# Altium PCB Chassis_V1.PcbDoc
Units mm, origin at the board's own origin, x right, y up, seen from the top; angles counter-clockwise.
Board outline 52 x 26 mm, 2 copper layers (Top Layer, Bottom Layer); 53 components, 34 nets, 197 pads, 50 vias.
Unrouted connection lines stored in the file: 50.
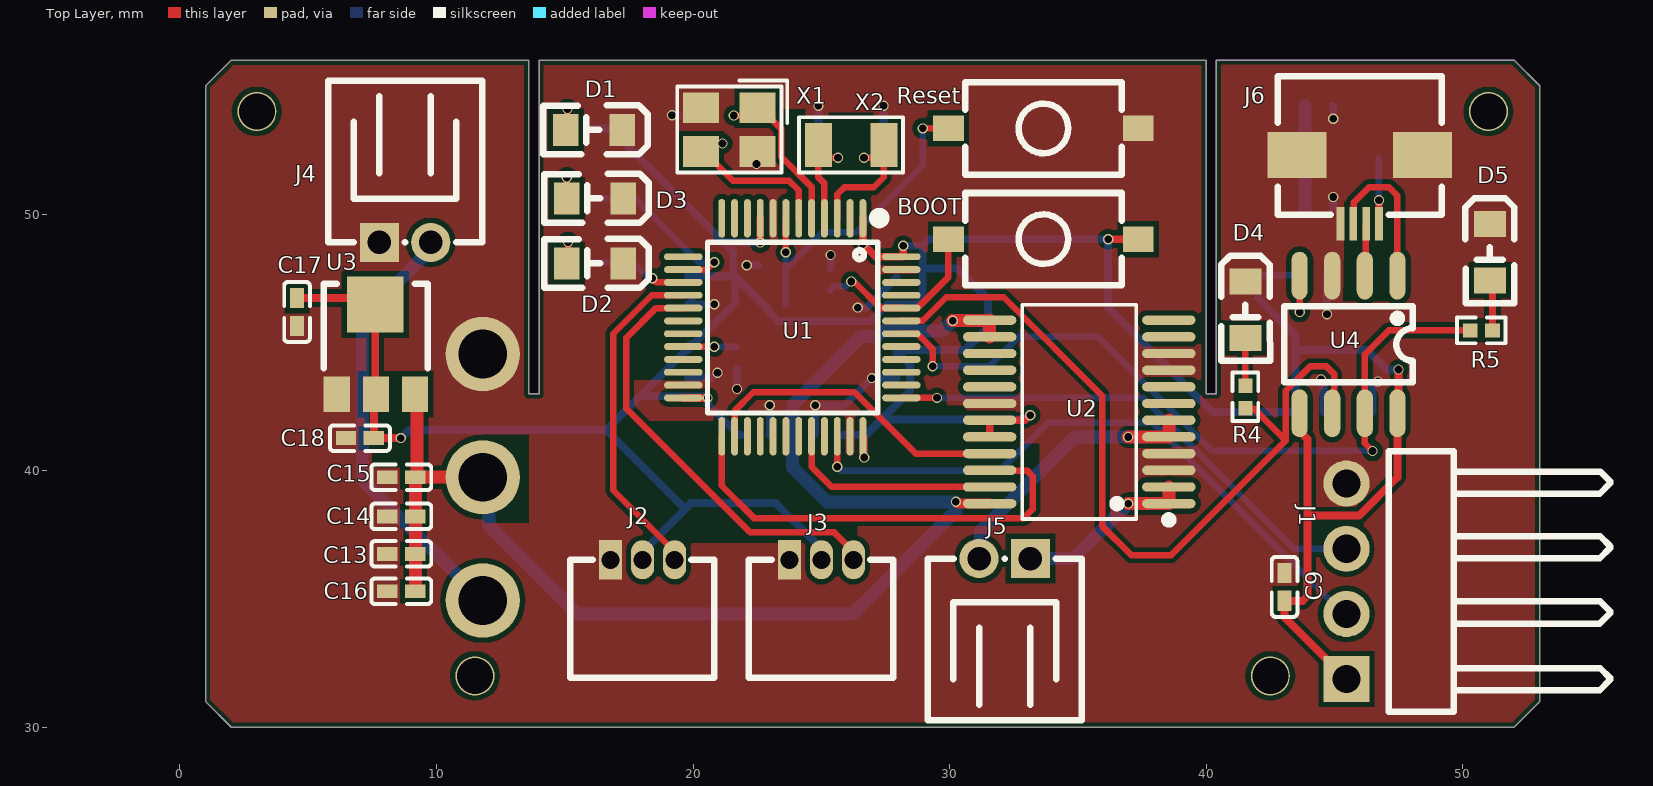
[diagram p0: Top Layer view]
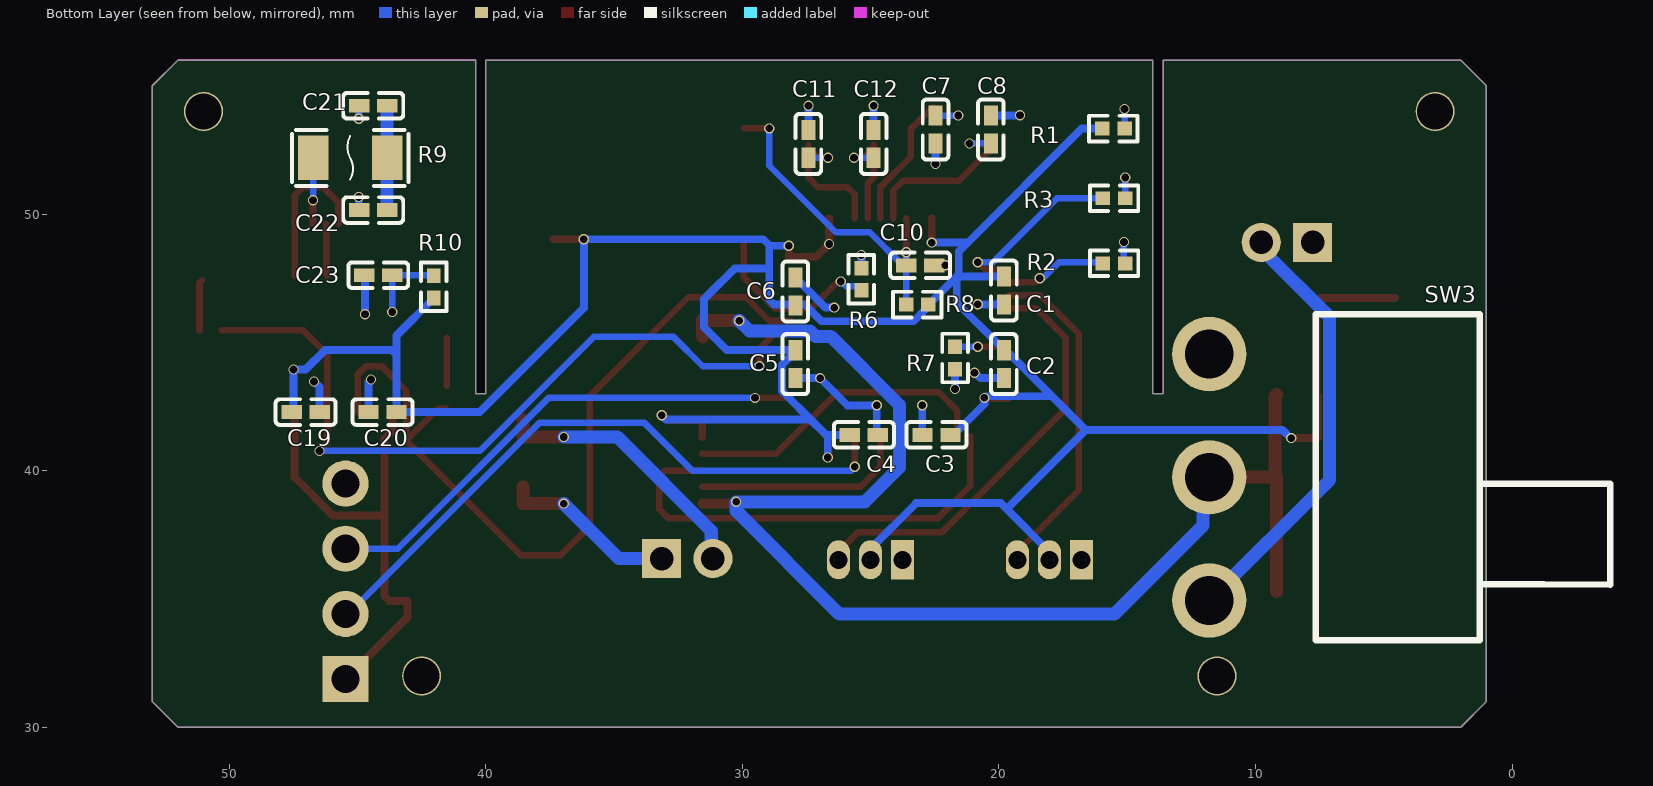
[diagram p1: Bottom Layer view, seen from below]

## Layer stack, top to bottom
Top Solder: solder mask 0.0102, Solder Resist, Dk 3.5
Top Layer: signal copper 0.0356
Dielectric 1: dielectric 0.32, FR-4, Dk 4.8
Bottom Layer: signal copper 0.0356
Bottom Solder: solder mask 0.0102, Solder Resist, Dk 3.5

## Board outline
2,30 1,31 1,55 2,56 13.6,56 13.6,43 14,43 14,56 40,56 40,43 40.4,43 40.4,56 52,56 53,55 53,31 52,30

## Design rules (kind name [scope] priority, off if disabled: settings)
Clearance [All] p1: gap=0.2 ignorepadtopadclearanceinfootprint=FALSE except(0: Arc-Hole Track-Hole SMDPad-Hole THPad-Hole Via-Hole Fill-Hole Poly-Hole Region-Hole Text-Hole; 0.1: Arc-SMDPad Track-SMDPad SMDPad-SMDPad; 0.18: Arc-Arc Arc-Track Arc-THPad Arc-Via Arc-Fill Arc-Poly Arc-Region Arc-Text Track-Track Track-THPad Track-Via Track-Fill Track-Poly Track-Region Track-Text; 0.5: THPad-Via Via-Via)
HoleToHoleClearance [All] p1: gap=0.305 allowstackedmicrovias=TRUE
MinimumSolderMaskSliver [All] p1: minsoldermaskwidth=0.051
PasteMaskExpansion [All] p1: expansion=0.05
PlaneClearance [All] p1: clearance=0.254
PlaneConnect [All] p1: planeconnectstyle=Direct reliefexpansion=0.508 reliefentries=4 reliefconductorwidth=0.254 reliefairgap=0.254
PolygonConnect [All] p1: connectstyle=Direct reliefconductorwidth=0.254 reliefentries=4 polygonreliefangle="90 Angle" airgapwidth=0.254
RoutingVias [All] p1: holewidth=0.3 width=0.4 viastyle="Through Hole" minholewidth=0.3 minwidth=0.4 maxholewidth=0.3 maxwidth=0.4
SilkToSilkClearance [All] p1: silktosilkclearance=0.025
SilkToSolderMaskClearance [IsPad] p1: minsilkscreentomaskgap=0.051 clearancetoexposedcopper=TRUE
SolderMaskExpansion [All] p1: expansion=0.1 istentingtop=FALSE
UnRoutedNet [All] p1: checkbadconnections=TRUE
Width PWR_idth [InNetClass('PWR')] p1: maxlimit=0.508 minlimit=0.305 preferedwidth=0.305 minimp=50.000000 maximp=50.000000 favimp=50.000000
Width [All] p2: maxlimit=0.254 minlimit=0.254 preferedwidth=0.254
22 further rules are at their usual default settings.

## Classes and differential pairs
net class PWR: AO1 AO2 GND NetJ4_2 VBUS "VCC 3V3" VM

## Components (designator, comment, footprint, x,y, rotation, side; value= is the part's Value field where it differs from the comment)
BOOT "Switch" KEY-SMD_2P-L6.0-W3.6-P7.4-LS8.0-L 33.655,49.022 r0 top (schematic designator SW1)
C1 "CAP-0402" C0402 19.806,47.021 r90 bottom
C2 "CAP-0402" C0402 19.806,44.153 r90 bottom
C3 "CAP-0402" C0402 22.436,41.396 r180 bottom
C4 "CAP-0402" C0402 25.267,41.396 r0 bottom
C5 "CAP-0402" C0402 27.934,44.153 r90 bottom
C6 "CAP-0402" C0402 27.934,46.984 r270 bottom
C7 "CAP-0402" C0402 22.473,53.297 r270 bottom
C8 "CAP-0402" C0402 20.314,53.297 r270 bottom
C9 "CAP-0402" C0402 43.053,35.47 r270 top
C10 "CAP-0402" C0402 23.071,48 r0 bottom
C11 "CAP-0402" C0402 27.426,52.736 r270 bottom
C12 "CAP-0402" C0402 24.886,52.736 r270 bottom
C13 "CAP-0402" C0402 8.63,36.759 r0 top
C14 "CAP-0402" C0402 8.63,38.221 r0 top
C15 "CAP-0402" C0402 8.63,39.745 r0 top
C16 "CAP-0402" C0402 8.63,35.3 r0 top
C17 "CAP-0402" C0402 4.566,46.185 r90 top
C18 "CAP-0402" C0402 7.016,41.269 r0 top
C19 "CAP-0402" C0402 47.021,42.285 r0 bottom
C20 "CAP-0402" C0402 44.026,42.285 r180 bottom
C21 "CAP-0402" C0402 44.386,54.223 r180 bottom
C22 "CAP-0402" C0402 44.386,50.159 r180 bottom
C23 "CAP-0402" C0402 44.19,47.619 r180 bottom
D1 "LED0805-RD" LED0805-RD 16.142,53.283 r180 top
D2 "LED0805-RD" LED0805-RD 16.182,48.081 r180 top
D3 "LED0805-RD" LED0805-RD 16.182,50.616 r180 top
D4 "LED0805-RD" LED0805-RD 41.529,46.271 r270 top
D5 "LED0805-RD" LED0805-RD 51.054,48.514 r270 top
J1 "HDR-1X4" HDR-TH_4P-P2.54-H-M-W10.4 45.466,35.687 r90 top
J2 "MX1.25-3pin" CONN-TH_3P-P1.25_BX-MX1.25-3PWZ 18.034,36.527 r0 top
J3 "MX1.25-3pin" CONN-TH_3P-P1.25_BX-MX1.25-3PWZ 25.004,36.527 r0 top
J4 "PH2.0-2pin" CONN-TH_2P-P2.00_GP01-2001WR-2P 8.779,48.895 r0 top
J5 "PH2.0-2pin" CONN-TH_2P-P2.00_GP01-2001WR-2P 32.147,36.576 r180 top
J6 "AFC01-S04FCC-00" FFC-SMD_4P-P0.50_AFC01-S04FCC-00 45.985,50.966 r180 top
R1 "RES-0402" R0402 15.539,53.334 r0 bottom
R2 "RES-0402" R0402 15.514,48.081 r0 bottom
R3 "RES-0402" R0402 15.514,50.616 r0 bottom
R4 "RES-0402" R0402 41.529,42.874 r270 top
R5 "RES-0402" R0402 50.725,45.466 r180 top
R6 "RES-0402" R0402 25.362,47.461 r90 bottom
R7 "RES-0402" R0402 21.711,44.392 r90 bottom
R8 "RES-0402" R0402 23.183,46.476 r180 bottom
R9 "TLC F1206" F1206 45.284,52.191 r180 bottom
R10 "RES-0402" R0402 42.031,47.162 r270 bottom
Reset "Switch" KEY-SMD_2P-L6.0-W3.6-P7.4-LS8.0-L 33.655,53.34 r180 top (schematic designator SW2)
SW3 "Switch-弯插滑动开关" SW-TH_3P-SS12D06-1 11.805,39.745 r90 bottom
U1 "STM32F103C8T6" LQFP-48_L7.0-W7.0-P0.50-LS9.0-BL 23.87,45.587 r180 top
U2 "TB6612FNG" SSOP-24_L8.4-W5.8-P0.65-LS7.8-BL 35.052,42.291 r90 top
U3 "CJA1117B-3.3" SOT-89 7.684,42.99 r0 top
U4 "CH340N" SOP-8_L4.9-W3.9-P1.27-LS6.0-BL 45.547,44.92 r180 top
X1 "OSC CRYSTAL-SMD_4P-L3.2-W2.5-BL" CRYSTAL-SMD_4P-L3.2-W2.5-BL 21.414,53.295 r180 top
X2 "OSC" OSC-SMD_L3.2-W1.5 26.161,52.695 r180 top

## Footprints (in the part's own frame and the unit in brackets; to place one, negate y for a bottom-side part, rotate by r counter-clockwise, add the part's x,y. Pads: shape width x height; smd on the part's side, far side on the other; paste and mask are expansions set on the pad)
C0402 [mm]
  rect 0.79x0.54 smd paste-100 mask+0.051: 1(-0.545,0) 2(0.545,0)
  silkscreen extent -1.17,-0.5 1.17,0.5
CONN-TH_2P-P2.00_GP01-2001WR-2P [mil]
  rect 60x60 hole 36: 1(-39.37,0)
  round 60 hole 36: 2(39.37,0)
  silkscreen extent -118,0 118,248
CONN-TH_3P-P1.25_BX-MX1.25-3PWZ [mm]
  rect 0.9x1.524 hole 0.7: 1(-1.25,0)
  oval 0.9x1.524 hole 0.7: 2(0,0) 3(1.25,0)
  silkscreen extent -2.83,-4.6 2.8,0
CRYSTAL-SMD_4P-L3.2-W2.5-BL [mm]
  rect 1.4x1.2 smd paste+0 mask+0.051: 1(-1.1,-0.85) 2(1.1,-0.85) 3(1.1,0.85) 4(-1.1,0.85)
  silkscreen extent -2.26,-1.91 2.03,1.68
F1206 [mil]
  rect 46.9x68 smd paste+0 mask+2: 1(-56.9,0) 2(56.9,0)
  silkscreen extent -89,-43 89,43
FFC-SMD_4P-P0.50_AFC01-S04FCC-00 [mm]
  rect 0.3x1.3 smd paste+0 mask+0.05: 1(-0.75,1.34) 2(-0.25,1.34) 3(0.25,1.34) 4(0.75,1.34)
  rect 2.3x1.8 smd: 5(2.45,-1.34) 6(-2.45,-1.34)
  silkscreen extent -3.2,-4.4 3.2,1
HDR-TH_4P-P2.54-H-M-W10.4 [mm]
  rect 1.8x1.8 hole 1.1: 1(-3.81,0)
  round 1.8 hole 1.1: 2(-1.27,0) 3(1.27,0) 4(3.81,0)
  silkscreen extent -5.09,-10.27 5.07,-1.65
KEY-SMD_2P-L6.0-W3.6-P7.4-LS8.0-L [mm]
  rect 1.2x1 smd: 1(-3.7,0) 2(3.7,0)
  silkscreen extent -3.05,-1.8 3.05,1.8
LED0805-RD [mm]
  rect 1x1.25 smd paste+0 mask+0.051: 1(-1.1,0) 2(1.1,0)
  silkscreen extent -2.1,-0.95 1.98,0.96
LQFP-48_L7.0-W7.0-P0.50-LS9.0-BL [mm]
  oval 0.27x1.5 smd paste+0 mask+0.05: 1(-2.75,-4.25) 2(-2.25,-4.25) 3(-1.75,-4.25) 4(-1.25,-4.25) 5(-0.75,-4.25) 6(-0.25,-4.25) 7(0.25,-4.25) 8(0.75,-4.25) 9(1.25,-4.25) 10(1.75,-4.25) 11(2.25,-4.25) 12(2.75,-4.25) 25(2.75,4.25) 26(2.25,4.25) 27(1.75,4.25) 28(1.25,4.25) 29(0.75,4.25) 30(0.25,4.25) 31(-0.25,4.25) 32(-0.75,4.25) 33(-1.25,4.25) 34(-1.75,4.25) 35(-2.25,4.25) 36(-2.75,4.25)
  oval 1.5x0.27 smd paste+0 mask+0.05: 13(4.25,-2.75) 14(4.25,-2.25) 15(4.25,-1.75) 16(4.25,-1.25) 17(4.25,-0.75) 18(4.25,-0.25) 19(4.25,0.25) 20(4.25,0.75) 21(4.25,1.25) 22(4.25,1.75) 23(4.25,2.25) 24(4.25,2.75) 37(-4.25,2.75) 38(-4.25,2.25) 39(-4.25,1.75) 40(-4.25,1.25) 41(-4.25,0.75) 42(-4.25,0.25) 43(-4.25,-0.25) 44(-4.25,-0.75) 45(-4.25,-1.25) 46(-4.25,-1.75) 47(-4.25,-2.25) 48(-4.25,-2.75)
  silkscreen extent -3.59,-4.46 3.3,3.34
OSC-SMD_L3.2-W1.5 [mm]
  rect 1.05x1.7 smd: 1(-1.275,0) 2(1.275,0)
  silkscreen extent -2.03,-1.08 2.03,1.08
R0402 [mm]
  rect 0.566x0.54 smd paste-100 mask+0.051: 1(-0.433,0) 2(0.433,0)
  silkscreen extent -0.94,-0.5 0.94,0.5
SOP-8_L4.9-W3.9-P1.27-LS6.0-BL [mm]
  oval 0.63x1.865 smd: 1(-1.905,-2.682) 2(-0.635,-2.682) 3(0.635,-2.682) 4(1.905,-2.682) 5(1.905,2.682) 6(0.635,2.682) 7(-0.635,2.682) 8(-1.905,2.682)
  silkscreen extent -2.5,-1.5 2.5,1.48
SOT-89 [mil]
  rect 40x55 smd paste+0 mask+4: 1(-61.81,-0.58) 2(-1.81,-0.58) 3(58.19,-0.58)
  rect 86.61x86.61 smd paste+0 mask+4: 2(-2.76,137.22)
  silkscreen extent -82,39 78,169
SSOP-24_L8.4-W5.8-P0.65-LS7.8-BL [mm]
  oval 0.364x2.082 smd: 1(-3.575,-3.491) 2(-2.925,-3.491) 3(-2.275,-3.491) 4(-1.625,-3.491) 5(-0.975,-3.491) 6(-0.325,-3.491) 7(0.325,-3.491) 8(0.975,-3.491) 9(1.625,-3.491) 10(2.275,-3.491) 11(2.925,-3.491) 12(3.575,-3.491) 13(3.575,3.491) 14(2.925,3.491) 15(2.275,3.491) 16(1.625,3.491) 17(0.975,3.491) 18(0.325,3.491) 19(-0.325,3.491) 20(-0.975,3.491) 21(-1.625,3.491) 22(-2.275,3.491) 23(-2.925,3.491) 24(-3.575,3.491)
  silkscreen extent -4.36,-3.64 4.18,2.22
SW-TH_3P-SS12D06-1 [mm]
  round 2.9 hole 1.9: 1(-4.8,0) 2(0,0) 3(4.8,0)
  silkscreen extent -6.35,-15.62 6.35,-4.15

## Part data
BOOT Reset: "滑动开关", Actuator/Cap Color=白色, Contact Current=50mA, Insulation Resistance=-, JLCPCB Part Class=扩展库, LCSC Part Name="6*3.6*2.5mm 立贴 轻触开关", Manufacturer="XKB Connectivity(中国星坤)", Manufacturer Part=TS-1101-B-W, Operating Force=160gf, Operating Temperature=-30℃~+85℃, Voltage Rating (DC)=12V, Actuator Style=矩形按钮, Add into BOM=yes, Circuit=单刀单掷, Convert to PCB=yes, Datasheet=https://atta.szlcsc.com/upload/public/pdf/source/20211011/D0E0CAF534F7B19DDE4CE68748A25BD3.pdf, Device=TS-1101-B-W_C500065, Mechanical Life=5万次, Mounting Style=立贴, Strike Gundam=否, Supplier=LCSC, Supplier Footprint=SMD, Supplier Part=C500065, Switch Height=2.5mm, Switch Length=6mm, Switch Width=3.6mm, Symbol=TS-1101-B-W, With Lamp=无
C1 C2 C3 C4 C5 C6 C7 C8 C9 C10 C11 C12 C13 C14 C15 C16 C17 C18 C19 C20 C21 C22 C23: "0402贴片电容", JLCPCB Part Class="Extended Part", LCSC Part Name="100nF ±10% 50V", Manufacturer=SAMSUNG(三星), Manufacturer Part=CL21B104KBCNNNC, Temperature Coefficient=X7R, Tolerance=±10%, Voltage Rated=50V, Add into BOM=yes, Convert to PCB=yes, Datasheet=https://atta.szlcsc.com/upload/public/pdf/source/20160103/1457707693305.pdf, Device=CL21B104KBCNNNC, Supplier=LCSC, Supplier Footprint=0805, Supplier Part=C1711, Symbol=CL21B104KBCNNNC
D1 D2 D3 D4 D5: "LED", Color Temperature=-, Forward Current=20mA, Forward Voltage (VF)=3.3V, JLCPCB Part Class="Extended Part", LCSC Part Name=LED贴片0805超高亮蓝光, Lens Color=无色透明, Manufacturer=MEIHUA(美华科技), Manufacturer Part=MHT170UBCT, Operating Temperature=-40~+85, Power Dissipation=95mW, Add into BOM=yes, Convert to PCB=yes, Datasheet=https://atta.szlcsc.com/upload/public/pdf/source/20190515/C389525_9DDE5770D44EFFE682D3E1E38A61D6F4.pdf, Device=MHT170UBCT, Diode Configuration=-, Dominant Wavelength=460nm~475nm, Luminous Flux (@25℃)=-, Luminous Intensity=225mcd, Mounting Sytle=-, Peak Wavelength=468nm, Supplier=LCSC, Supplier Footprint=0805, Supplier Part=C389525, Symbol=MHT170UBCT, Viewing Angle=140°
J1: library part HDR-1X4-弯排针, "1X4弯排针", Add into BOM=yes, Convert to PCB=yes, Device=HDR-M_2.54_1x4P, Supplier Footprint=插件, Supplier Part=C2935929, Symbol=PZ254V-11-04P
J2 J3: "MX1.25 3pin 公头端子", Add into BOM=yes, Convert to PCB=yes, Device=HDR-M_2.54_1x3P, Supplier Footprint=插件, Supplier Part=C2937625, Symbol=PZ254V-11-03P_C2937625
J4 J5: "PH2.0-2pin公头端子", BOM名称=2P接插件, 封装库来自淘宝卖家 ID：黄晶宝石=其他店铺购入均为盗版假冒封装库, 联系卖家，免费查找封装=唯一出售店铺网址https://shop463601444.taobao.com
J6: library part FPC0.5-4pin, "4pin FPC接口，间距0.5mm", JLCPCB Part Class="Extended Part", LCSC Part Name="间距:0.5mm P数:4P 翻盖式 下接", Manufacturer=JS(钜硕电子), Add into BOM=yes, Contact Type=下接, Convert to PCB=yes, Datasheet=https://atta.szlcsc.com/upload/public/pdf/source/20190816/C413942_2A72D1AC756EAE17EEDF756A339D4500.pdf, Device=AFC01-S04FCC-00, FFC, FCB Thickness=0.3mm, Height Above Board=2mm, Locking Feature=翻盖式, Manufacturer Part=AFC01-S04FCC-00, Mounting Type=卧贴, Number of Contacts=4P, Pitch=0.5mm, Supplier=LCSC, Supplier Footprint=SMD,P=0.5mm,卧贴, Supplier Part=C262260, Symbol=AFC01-S04FCC-00
R1 R2 R3 R4 R5 R6 R7 R8 R10: "0402贴片电阻", JLCPCB Part Class="Extended Part", LCSC Part Name="1kΩ ±5%", Manufacturer=FH(风华), Manufacturer Part=RS-05K102JT, Operating Temperature Range=-55~+155, Overload Voltage (Max)=150V, Power(Watts)=125mW, Temperature Coefficient=±100ppm/, Tolerance=±5%, Add into BOM=yes, Convert to PCB=yes, Datasheet=https://atta.szlcsc.com/upload/public/pdf/source/20170704/1499151304704.pdf, Device=RS-05K102JT, Supplier=LCSC, Supplier Footprint=0805, Supplier Part=C115302, Symbol=RS-05K102JT
R9: "保险丝", Current Rating (Max)=100A, Hold Current=1A, JLCPCB Part Class="Extended Part", LCSC Part Name="6V 1A 自恢复", Manufacturer=TLC(竞沃), Manufacturer Part=TLC-NSMD100, Operating Temperature=-40~+85, Operating Voltage (Max)=6V, Power Dissipation=600mW, Resistance - Initial (Ri) (Min)=-, Trip Current=2A, Add into BOM=yes, Convert to PCB=yes, Datasheet=https://atta.szlcsc.com/upload/public/pdf/source/20180802/C261954_CE31CE21EEB143DB51778C363DF0F083.pdf, Device=TLC-NSMD100, Maximum Time to Trip=100ms, Resistance - Post Trip (R1) (Max)=-, Supplier=LCSC, Supplier Footprint=1206, Supplier Part=C261954, Symbol=TLC-NSMD100
SW3: "弯插滑动开关", Current Rating (DC)=2A, JLCPCB Part Class="Extended Part", LCSC Part Name="两档卧式插件 3脚拨动开关弯插 柄长5.0mm", Manufacturer="SHOU HAN(首韩)", Manufacturer Part=SS12D10G5-WJ, Operating Temperature=-25℃~+70℃, Voltage Rating (DC)=125V, Add into BOM=yes, Circuit=单刀双掷, Convert to PCB=yes, Datasheet=https://atta.szlcsc.com/upload/public/pdf/source/20230621/24203FB22DE8BDD2A5BD75F3B5E716C8.pdf, Device=SS12D10G5-WJ, Mechanical Life=3千次, Mounting Style=直插, Supplier=LCSC, Supplier Footprint=插件, Supplier Part=C7431058, Switch Length=12.7mm, Switch Width=6.7mm, Symbol=SS12D10G5-WJ
U1: "STM32F103C8T6 MCU", JLCPCB Part Class=扩展库, LCSC Part Name="STM32F103C8T6 MSL=3", Low-Voltage Detect=有, Manufacturer=ST(意法半导体), Operating Temperature Range=-40℃~+85℃, Operating Voltage Range=2V~3.6V, ADC (Bit)=12bit, Add into BOM=yes, CCP Capture/Compare=-, communication protocol=-, Convert to PCB=yes, CPU Core=CM3, CPU Maximum Speed=72MHz, DAC (Bit)=-, Datasheet=https://atta.szlcsc.com/upload/public/pdf/source/20220812/8363ACEC51AD55ECEB84799464F7CB85.pdf, Device=STM32F103C8T6, Direct Memory Access=有, GPIO Ports Number=37, Infrared Data Association=有, Internal Comparator=-, Internal Oscillator=有, Manufacturer Part=STM32F103C8T6, Peripheral/Function=看门狗；DMA；看门狗；片载温度传感器, Program Memory Type=FLASH, Program Storage Size=64KB, PWM (Bit)=-, RAM Size=20KB, Real-Time Clock=-, Secure Digital Input and Output=-, Supplier=LCSC, Supplier Footprint=LQFP-48(7x7), Supplier Part=C8734, Symbol=STM32F103C8T6, Universal Serial Bus=有, Watchdog=有
U2: "TB6612FNG电机驱动", BOM名称=TB6612FNG, 联系卖家，免费查找封装=唯一出售店铺网址https://shop463601444.taobao.com
U3: "3.3V线性稳压器"
U4: "USB转串口", JLCPCB Part Class="Extended Part", LCSC Part Name=USB转串口芯片CH340, Manufacturer=WCH(南京沁恒), Operating Temperature=-20℃~+70℃, Supply Voltage=3.3V；5V, Add into BOM=yes, Applications Function=USB转串口, Convert to PCB=yes, Data Rate=2Mbps, Datasheet=https://atta.szlcsc.com/upload/public/pdf/source/20240313/115CDE92081B1D6CB446704AD5D0F5F2.pdf, Device=CH340N, Manufacturer Part=CH340N, Number of Channels=1, Protocol="USB 2.0", Supplier=LCSC, Supplier Footprint=SOP-8, Supplier Part=C2977777, Symbol=CH340N_C2977777
X1: "四脚晶振", Equivalent Series Resistance (ESR)=80Ω, Frequency Stability=-, Frequency Tolerance=±10ppm, JLCPCB Part Class="Extended Part", LCSC Part Name="12MHz ±10ppm 20pF", Load Capacitance=20pF, Manufacturer=JGHC(晶光华), Manufacturer Part=S3212000201080, Operating Temperature=-40~+85, Add into BOM=yes, Convert to PCB=yes, Crystal Type=贴片无源晶振, Datasheet=https://atta.szlcsc.com/upload/public/pdf/source/20191012/C426972_E2C41F8C78BF72E52773F7737EA32F83.pdf, Device=S3212000201080, Supplier=LCSC, Supplier Footprint=SMD3225-4P, Supplier Part=C426972, Symbol=S3212000201080
X2: "两脚晶振", External load capacitor=12.5pF, Frequency Stability(Full temperature range)=-, JLCPCB Part Class=扩展库, LCSC Part Name="32.768kHz ±20ppm 12.5pF", Manufacturer=YXC(扬兴晶振), Manufacturer Part=X321532768KGD2SI, Normal temperature Frequency Tolerance=±20ppm, Operating Temperature=-40℃~+85℃, Add into BOM=yes, Convert to PCB=yes, Crystal Type=贴片晶振, Datasheet=https://atta.szlcsc.com/upload/public/pdf/source/20240329/3A7650FD985DD0DE85694D3785AB4916.pdf, Device=X321532768KGD2SI, Supplier=LCSC, Supplier Footprint=SMD3215-2P, Supplier Part=C620155, Symbol=X321532768KGD2SI

## Free pads (board coordinates)
  round 1.524 hole 1.4 mask+0.7: 2(3,54) 3(51,54) 4(42.5,32)
  round 1.524 hole 1.4 mask+0.5: 5(11.5,32)

## Via types
v1: diameter 0.4, hole 0.3, Top Layer to Bottom Layer, 50 vias

## Nets (pads, with @x,y where several pads share a name; then routed paths per layer and width w, separated by ;. In a path a pad name is that pad's centre, name@x,y a point inside that pad or via, vN(x,y) a via of type N, cw(c..) or ccw(c..) an arc to the next point about the centre after c; other vN are vias at no path point)
AIN1: U1.26 U2.21 | length 12.2
  Top Layer w0.254: U1.26 21.62,42.322 22.349,43.052 26.29,43.052 28.676,40.666 U2.21
AIN2: U1.25 U2.22 | length 17.8
  Top Layer w0.254: U1.25 21.12,39.408 22.372,38.155 32.896,38.155 33.243,38.503 33.243,39.782 33.02,40.005 31.572,40.005 U2.22
AO1: J5.1 U2.1 U2.2 | length 6.9
  Top Layer w0.508: v1(36.957,38.716) U2.1 U2.2
  Bottom Layer w0.508: J5.1 34.817,36.576 v1(36.957,38.716)
AO2: J5.2 U2.5 U2.6 | length 10.6
  Top Layer w0.508: v1(36.957,41.316) U2.5 U2.6
  Bottom Layer w0.508: J5.2 31.213,36.642 31.213,37.65 34.879,41.316 v1(36.957,41.316)
BOOT0: BOOT.1 R6.1 U1.44 | length 7.2
  Top Layer w0.254: v1(26.162,47.371) 26.248,47.371 26.264,47.386 27.31,46.34 28.117,46.34 U1.44 28.739,46.337 28.877,46.475 28.885,46.475 29.955,47.545 BOOT.1
  Bottom Layer w0.254: R6.1@25.355,47.035 R6.1@25.362,47.041 ; R6.1 25.517,47.184 25.975,47.184 v1(26.162,47.371)
BOOT1: R7.2 U1.20 | length 2.1
  Top Layer w0.254: U1.20 19.623,44.834 20.249,44.834 20.252,44.831 v1(20.828,44.831)
  Bottom Layer w0.254: v1(20.828,44.831) 21.704,44.831 R7.2
D+: J6.3 U4.1 | length 6
  Top Layer w0.254: J6.3 45.758,49.649 45.758,50.457 46.355,51.054 47.117,51.054 47.452,50.719 U4.1
D-: J6.2 U4.2 | length 2
  Top Layer w0.254: U4.2 46.212,47.632 46.212,49.603 J6.2
GND: C1.1 C2.1 C3.1 C4.1 C5.1 C6.1 C7.2 C8.1 C9.1 C10.1 C11.1 C12.1 C13.1 C14.1 C15.1 C16.1 C17.1 C18.1 C19.1 C20.1 C21.1 C22.1 C23.1 D1.1 D2.1 D3.1 D4.1 D5.1 J1.4 J2.1 J3.1 J4.1 J6.4 J6.5 J6.6 R6.2 R7.1 Reset.1 SW3.3 U1.8 U1.23 U1.35 U1.47 U2.3 U2.4 U2.9 U2.10 U2.18 U3.1 U4.3 X1.2 X1.4 | length 21.1
  Bottom Layer w0.305: v1(19.177,53.848) 20.307,53.848 C8.1 ; C2.1 20.722,43.607 20.929,43.815 v1(20.955,43.815) ; C1.1 19.939,46.609 20.066,46.482 v1(20.828,46.482) ; R7.1 21.717,43.953 v1(21.717,43.18) ; v1(22.098,48.006) 22.519,48.006 C10.1 ; v1(22.473,51.949) C7.2 C7.2@22.525,52.699 ; C3.1 22.987,41.402 v1(22.987,42.545) ; C4.1 24.765,41.439 v1(24.765,42.545) 25.908,42.545 v1(26.97,43.607) C5.1 ; C12.1 v1(24.886,54.223) ; R6.2 v1(25.362,48.402) ; v1(26.416,46.355) 26.76,46.355 C6.1 ; C11.1 v1(27.426,54.223) ; v1(44.478,43.555) 44.571,43.462 C20.1 ; v1(44.704,46.101) 44.704,47.588 C23.1 ; C22.1 44.952,50.179 v1(44.952,50.667) ; C21.1 44.952,54.202 v1(44.952,53.715) ; C19.1 46.476,43.258 v1(46.692,43.475)
IMG: R3.2 U1.14 | length 7.2
  Top Layer w0.254: U1.14 19.623,47.84 20.535,47.84 v1(20.822,48.127)
  Bottom Layer w0.254: R3.2 17.742,50.616 20.231,48.127 v1(20.822,48.127)
NetC23_2: C23.2 R10.1 U4.4 | length 4.5
  Top Layer w0.254: U4.4 43.643,47.601 43.643,46.186 v1(43.645,46.185)
  Bottom Layer w0.254: R10.1 42.042,47.607 43.633,47.607 C23.2 v1(43.645,46.185)
NetD1_2: D1.2 R1.1 | length 1.6
  Top Layer w0.254: D1.2 15.107,53.347 v1(15.107,54.096)
  Bottom Layer w0.254: R1.1 v1(15.107,54.096)
NetD2_2: D2.2 R2.1 | length 1.6
  Top Layer w0.254: D2.2 15.13,48.129 v1(15.13,48.912)
  Bottom Layer w0.254: R2.1@15.13,48.127 v1(15.13,48.912)
NetD3_2: D3.2 R3.1 | length 1.6
  Top Layer w0.254: D3.2 v1(15.082,51.429)
  Bottom Layer w0.254: R3.1 v1(15.082,51.429)
NetD4_2: D4.2 R4.1 | length 1.9
  Top Layer w0.254: R4.1 D4.2
NetD5_2: D5.2 R5.1 | length 2
  Top Layer w0.254: D5.2 51.158,47.31 R5.1
NetJ4_2: J4.2 SW3.1 | length 17
  Bottom Layer w0.508: J4.2 9.779,48.641 7.112,45.974 7.112,39.637 SW3.1
NetJ6_1: J6.1 R9.1 | length 2.6
  Top Layer w0.254: J6.1 v1(46.735,50.535)
  Bottom Layer w0.254: R9.1 46.73,50.54 v1(46.735,50.535)
NRST: C10.2 R8.1 Reset.2 U1.7 | length 12.8
  Top Layer w0.254: v1(23.616,48.508) 23.62,48.512 U1.7 ; v1(28.956,53.34) Reset.2
  Bottom Layer w0.254: R8.1 C10.2 ; v1(23.616,48.508) C10.2 ; v1(28.956,53.34) 28.95,53.334 28.95,51.883 26.362,49.295 25.036,49.295 23.741,48 C10.2
OSC32_IN: C11.2 U1.3 X2.1 | length 6
  Top Layer w0.254: U1.3 25.623,49.84 25.623,50.769 25.902,51.048 27.045,51.048 27.436,51.439 X2.1@27.436,52.589 ; v1(26.664,52.191) 27.038,52.191 X2.1@27.436,52.589 ; X2.1 X2.1@27.436,52.589
  Bottom Layer w0.254: v1(26.664,52.191) C11.2
OSC32_OUT: C12.2 U1.4 X2.2 | length 4.6
  Top Layer w0.254: X2.2 X2.2@24.886,52.589 ; U1.4 25.12,51.195 24.886,51.429 X2.2@24.886,52.589 ; v1(25.648,52.191) 25.284,52.191 X2.2@24.886,52.589
  Bottom Layer w0.254: C12.2 v1(25.648,52.191)
OSC_IN: C7.1 U1.5 X1.1 | length 7.2
  Top Layer w0.254: v1(21.584,53.842) 22.211,53.842 X1.1 22.614,54.145 23.441,53.318 23.441,52.239 24.62,51.06 U1.5
  Bottom Layer w0.254: v1(21.584,53.842) C7.1
OSC_OUT: C8.2 U1.6 X1.3 | length 7.3
  Top Layer w0.254: v1(21.15,52.751) 20.62,52.751 X1.3 20.414,52.445 21.557,51.302 23.743,51.302 24.12,50.925 U1.6
  Bottom Layer w0.254: C8.2 v1(21.15,52.751)
PC: R2.2 U1.15 | length 4
  Top Layer w0.254: v1(18.415,47.498) 18.576,47.337 U1.15
  Bottom Layer w0.254: R2.2@15.996,48.127 17.659,48.127 18.288,47.498 v1(18.415,47.498)
PWMA: U1.32 U2.23 | length 8.5
  Top Layer w0.254: U1.32 24.62,40.15 25.404,39.366 U2.23
RX: R4.2 U1.43 U4.6 | length 32.3
  Top Layer w0.254: U1.43 28.123,45.84 28.949,45.84 29.867,46.758 32.107,46.758 35.941,42.923 35.941,37.846 37.084,36.703 38.631,36.703 43.1,41.171 ; R4.2@41.552,42.418 41.853,42.418 43.1,41.171 ; U4.6 44.985,42.31 44.985,43.765 44.688,44.062 44.046,44.062 43.1,43.115 43.1,41.171
SERVO1: J2.3 U1.16 | length 13.2
  Top Layer w0.254: J2.3 19.284,36.839 16.891,39.232 16.891,45.339 18.389,46.837 U1.16
SERVO2: J3.3 U1.17 | length 16.9
  Top Layer w0.254: U1.17 18.56,46.337 17.399,45.175 17.399,42.418 22.221,37.596 25.497,37.596 26.253,36.839 J3.3
SWCLK: J1.3 U1.37 | length 19.8
  Top Layer w0.254: U1.37 v1(29.506,42.837)
  Bottom Layer w0.254: v1(29.506,42.837) 37.554,42.837 43.434,36.957 J1.3
SWDIO: J1.2 U1.34 | length 25
  Top Layer w0.254: v1(25.616,40.156) 25.62,40.159 U1.34
  Bottom Layer w0.254: v1(25.616,40.156) 25.766,40.006 31.96,40.006 33.831,41.877 37.9,41.877 45.36,34.417 J1.2
TX: R5.2 U1.42 U4.7 | length 30
  Top Layer w0.254: U1.42 28.739,45.337 28.877,45.199 28.885,45.199 29.337,44.746 v1(29.337,44.069) ; v1(46.482,40.767) 46.182,41.067 U4.7 46.182,44.531 47.117,45.466 R5.2
  Bottom Layer w0.254: v1(29.337,44.069) 31.541,44.069 32.684,45.212 35.793,45.212 40.238,40.767 v1(46.482,40.767)
VBUS: C21.2 C22.2 R9.2 | length 4.1
  Bottom Layer w0.305: R9.2 R9.2@43.841,52.189
  Bottom Layer w0.508: C22.2 R9.2@43.841,52.189 ; R9.2@43.841,52.193 C21.2
"VCC 3V3": BOOT.2 C1.2 C2.2 C3.2 C4.2 C5.2 C6.2 C9.2 C17.2 C18.2 C19.2 C20.2 J1.1 J2.2 J3.2 R1.2 R8.2 R10.2 U1.1 U1.9 U1.24 U1.36 U1.48 U2.19 U2.20 U3.2 U4.5 U4.8 | length 147.5
  Top Layer w0.305: C17.2 7.487,46.73 U3.2@7.741,46.476 ; U3.2@7.561,42.899 C18.2 v1(8.609,41.269) ; U3.2@7.614,43 U3.2@7.614,46.476 ; U1.24 v1(20.568,42.837) ; v1(22.62,48.889) U1.9 ; U1.36 26.637,41.319 26.637,40.572 26.67,40.539 v1(26.67,40.513) ; U1.1 v1(26.62,48.836) 27.119,48.337 U1.48 U1.48@28.177,48.337 ; U1.48@28.194,48.354 v1(28.194,48.768) ; U2.20 U2.19 32.924,41.966 33.122,42.164 v1(33.147,42.164) ; v1(36.178,49.022) BOOT.2 ; U4.5 43.642,41.532 43.942,41.231 43.942,38.252 ; J1.1 43.053,34.29 C9.2 43.763,34.925 43.942,35.104 43.942,38.252 ; v1(47.498,43.942) 47.498,42.284 U4.8 47.452,39.74 45.964,38.252 43.942,38.252
  Bottom Layer w0.305: v1(8.609,41.269) 8.63,41.269 8.947,41.586 16.619,41.586 ; R1.2 16.77,53.334 21.215,48.889 ; J2.2 18.034,36.846 19.677,38.489 ; C2.2 C2.2@19.806,44.773 ; C1.2 21.647,47.566 ; C3.2 21.765,41.396 20.568,42.593 v1(20.568,42.837) 20.504,42.9 17.933,42.9 ; v1(22.62,48.889) 21.215,48.889 ; J3.2 25.003,36.959 23.228,38.735 19.923,38.735 19.677,38.489 ; C4.2 26.744,41.396 ; v1(26.67,40.513) 26.67,41.322 26.744,41.396 ; v1(28.194,48.768) 28.93,48.768 ; v1(33.147,42.164) 32.98,41.997 27.345,41.997 ; R10.2 42.031,46.717 43.48,45.267 43.48,44.525 ; C19.2 47.498,42.352 v1(47.498,43.942) 47.024,43.942 46.262,44.704 43.659,44.704 43.48,44.525 ; 16.619,41.586 19.677,38.529 19.677,38.489 ; 16.619,41.586 17.933,42.9 ; 17.933,42.9 C2.2@19.806,44.773 ; C2.2@19.806,44.773 19.806,44.823 19.923,44.94 20.039,44.94 21.647,46.548 21.647,47.566 ; 21.215,48.889 21.566,48.538 21.566,47.647 21.647,47.566 ; 21.647,47.566 22.737,46.476 R8.2 22.763,46.476 22.88,46.358 22.88,46.269 23.327,45.823 26.913,45.823 27.573,46.482 28.777,46.482 28.956,46.661 28.956,47.879 ; 26.744,41.396 27.345,41.997 ; 27.345,41.997 28.308,42.96 28.456,43.108 28.456,44.126 28.127,44.455 28.051,44.455 27.934,44.573 C5.2 30.601,44.698 31.496,45.593 31.496,46.684 31.317,46.863 30.301,47.879 28.956,47.879 ; 28.93,48.768 28.956,48.742 28.956,47.879 ; 28.93,48.768 29.184,49.022 v1(36.178,49.022) 36.178,46.343 40.236,42.285 C20.2 43.48,44.525
VM: C13.2 C14.2 C15.2 C16.2 SW3.2 U2.13 U2.14 U2.24 U3.3 | length 54.5
  Top Layer w0.305: U3.3 U3.3@9.175,42.963 ; C14.2 C14.2@9.3,38.221
  Top Layer w0.381: v1(30.244,38.785) 30.309,38.72 31.557,38.72 U2.24
  Top Layer w0.508: C16.2 C13.2 C14.2 C15.2 ; U3.3@9.175,42.963 9.243,42.894 9.243,39.813 C15.2 ; SW3.2 C15.2 ; v1(30.122,45.847) U2.13@31.542,45.847 ; U2.14 U2.13
  Bottom Layer w0.508: SW3.2 12.041,39.508 12.041,37.869 15.501,34.409 26.221,34.409 30.244,38.432 v1(30.244,38.785) 25.222,38.785 23.883,40.124 23.883,42.559 26.56,45.236 27.156,45.236 27.367,45.447 29.722,45.447 v1(30.122,45.847)
pads on no net: U1.2 U1.10 U1.11 U1.12 U1.13 U1.18 U1.19 U1.21 U1.22 U1.27 U1.28 U1.29 U1.30 U1.31 U1.33 U1.38 U1.39 U1.40 U1.41 U1.45 U1.46 U2.7 U2.8 U2.11 U2.12 U2.15 U2.16 U2.17

## Polygon pours and split planes (outlines as drawn)
GND on Top Layer "GND_L01_P000" (solid, pour order 0): 2,30 1,31 1,55 2,56 13.6,56 13.6,43 14,43 14,56 40,56 40,43 40.4,43 40.4,56 52,56 53,55 53,31 52,30

## Keep-outs
Keep-Out Layer:
  lines w0.013: 1,31 1,55 2,56 13.6,56 13.6,43 14,43 14,56 40,56 40,43 40.4,43 40.4,56.007 51.993,56.007 53,55 53,31 52,30 49,30 5,30 2,30 1,31

## Other copper
Top Layer:
  pour cut-out: 27.432,42.545 30.607,42.545 30.607,40.894 28.702,40.894 28.702,41.021 27.305,42.418
  pour cut-out: 7.493,42.164 7.58,42.077 8.732,42.077 8.732,40.215 8.65,40.132 7.493,40.132
  pour cut-out: 45.385,48.776 47.085,48.776 47.139,48.722 47.139,46.672 47.076,46.609 45.339,46.609
  pour cut-out: 28.735,47.995 28.839,47.995 29.166,48.322 29.642,48.322 29.642,47.675 29.181,47.214 29.119,47.277 29.064,47.277 29.064,47.349 28.735,47.678
  pour cut-out: 32.824,40.977 32.924,41.076 33.514,41.076 33.514,39.824 33.02,40.318 32.798,40.318 32.798,40.379 32.732,40.445
  pour cut-out: 25.37,40.475 25.525,40.475 25.62,40.38 25.831,40.591 26.147,40.591 26.278,40.722 26.307,40.693 26.307,40.176 26.566,40.176 26.749,39.993 26.959,40.202 26.959,41.769 27.01,41.821 27.208,41.821 28.676,40.353 30.315,40.353 30.315,40.294 30.383,40.226 30.383,39.747 30.315,39.679 25.534,39.679 25.011,40.202 25.017,40.209 25.017,40.279 25.019,40.279 25.12,40.38
  pour cut-out: 21.433,40.303 21.61,40.48 24.129,40.48 25.404,39.205 25.404,39.053 29.892,39.053 29.954,38.991 29.954,38.802 29.831,38.679 29.831,38.667 22.303,38.667 21.433,39.537
  pour cut-out: 20.689,39.57 20.738,39.619 20.807,39.619 20.807,40.693 20.778,40.722 20.778,41.952 18.33,41.952 18.288,41.91
  pour cut-out: 21.331,37.167 26.245,37.167 26.416,37.338 26.416,38.1 21.209,38.1
  pour cut-out: 18.541,45.875 18.895,45.875 18.923,45.847 18.874,45.798 18.874,43.521 17.693,43.521 17.653,43.561 17.712,43.62 17.712,45.046
  pour cut-out: 17.204,42.004 17.253,42.053 17.355,42.053 21.786,37.622 21.331,37.167 19.399,37.167 17.204,39.362
  pour cut-out: 11.805,41.403 13.588,41.403 13.589,41.402 13.589,37.973 11.918,37.973 11.805,38.087
  pour cut-out: 23.368,54.102 24.384,54.102 24.384,51.816 24.306,51.816 23.754,52.368
  pour cut-out: 25.273,53.975 27.051,53.975 27.051,51.432 27.24,51.243 26.924,50.927 25.146,50.927